# EAGLE board f (EAGLE 7.1.0)
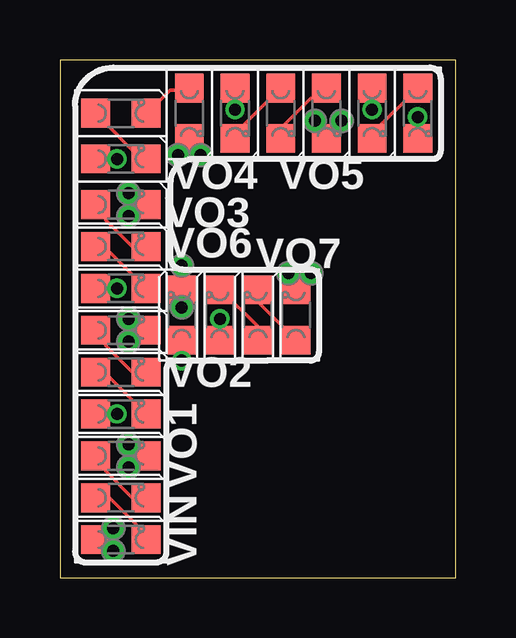
[diagram p0: board, top side]
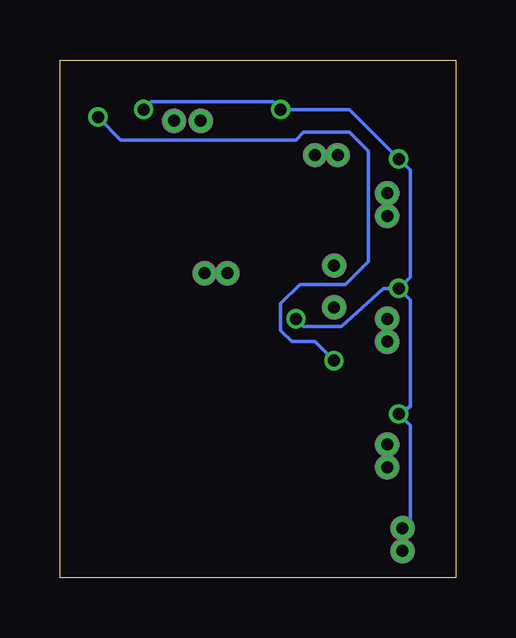
[diagram p1: board, bottom side, seen from below]

Size 16.51 x 21.59 mm. Coordinates in mm from the lower left corner, seen from the top.
Outline: 0,0 16.51,0 16.51,21.59 0,21.59 0,0
Copper layers (1*16): Top 0.035mm / dielectric 1.5mm / Bottom 0.035mm
Design rules "Fusion_eagle_rule_v1.1_tms *": minimum track width 6mil, minimum drill 12mil, track to track 6mil, track to pad 6mil, pad to pad 6mil, via to via 6mil, smd to smd 0mil, copper to edge 10mil, drill to drill 10mil, minimum pad ring 10mil, minimum via ring 6mil, stop-mask expansion 2mil, vias tented up to drill 100mil, thermal gap 10mil

## Footprints (pad centres in the part's own frame; a part is rotated, then mirrored left to right if it is on the bottom)
LED_0805 = smd 1.2 x 1.2: A 0,-1.05; C 0,1.05
P1-20 = drill 0.5: TP 0,0

## Placement (x,y rotation side)
LED1  [LED_0805]  2.54,1.59 270 top
LED2  [LED_0805]  2.54,3.33 270 top
LED3  [LED_0805]  2.54,5.08 270 top
LED4  [LED_0805]  2.54,6.83 270 top
LED5  [LED_0805]  2.54,8.57 270 top
LED6  [LED_0805]  2.54,10.32 270 top
LED7  [LED_0805]  2.54,12.06 270 top
LED8  [LED_0805]  2.54,13.81 270 top
LED9  [LED_0805]  2.54,15.56 270 top
LED10  [LED_0805]  2.54,17.46 270 top
LED11  [LED_0805]  2.54,19.37 270 top
LED12  [LED_0805]  5.4,19.37 180 top
LED13  [LED_0805]  7.3,19.37 180 top
LED14  [LED_0805]  9.21,19.37 180 top
LED15  [LED_0805]  11.11,19.37 180 top
LED16  [LED_0805]  13.02,19.37 180 top
LED17  [LED_0805]  14.92,19.37 180 top
LED18  [LED_0805]  5.08,10.95 0 top
LED19  [LED_0805]  6.67,10.95 0 top
LED20  [LED_0805]  8.26,10.95 0 top
LED21  [LED_0805]  9.84,10.95 0 top
VIN  [P1-20]  2.22,2.06 0 top
VIN1  [P1-20]  2.22,1.11 0 top
VO1  [P1-20]  2.86,4.6 0 top
VO2  [P1-20]  2.86,9.84 0 top
VO3  [P1-20]  2.86,16.03 0 top
VO4  [P1-20]  4.92,17.62 0 top
VO5  [P1-20]  10.64,19.05 0 top
VO6  [P1-20]  5.08,11.27 0 top
VO7  [P1-20]  10.48,12.7 0 top
VO8  [P1-20]  2.86,5.56 0 top
VO9  [P1-20]  2.86,10.79 0 top
VO10  [P1-20]  2.86,15.08 0 top
VO11  [P1-20]  5.87,17.62 0 top
VO12  [P1-20]  11.75,19.05 0 top
VO13  [P1-20]  5.08,13.02 0 top
VO14  [P1-20]  9.53,12.7 0 top

## Library data of the parts
LED1-LED21 VIN VIN1 VO1-VO14 = CyberRailGuru

## Nets
N$1: LED19.C LED20.A
N$2: LED20.C LED21.A
N$3: LED21.C VO7.TP VO14.TP
N$39: LED2.C LED3.A
N$40: LED1.C LED2.A
N$41: LED5.C LED6.A
N$42: LED4.C LED5.A
N$43: LED8.C LED9.A
N$44: LED7.C LED8.A
N$45: LED11.C LED12.A
N$46: LED10.C LED11.A
N$47: LED14.C LED15.A
N$48: LED13.C LED14.A
N$49: LED17.C LED18.A
N$50: LED16.C LED17.A
VIN: LED1.A LED4.A LED7.A LED10.A LED13.A LED16.A LED19.A VIN1.TP VIN.TP
VOUT1: LED3.C VO1.TP VO8.TP
VOUT2: LED6.C VO2.TP VO9.TP
VOUT3: LED9.C VO3.TP VO10.TP
VOUT4: LED12.C VO4.TP VO11.TP
VOUT5: LED15.C VO5.TP VO12.TP
VOUT6: LED18.C VO6.TP VO13.TP

## Tracks (layer width: path | path; a pad name or v marks a point on that pad's centre or on a via)
N$1
  Top 0.152: LED19.C 6.73,12 8.26,10.48 LED20.A
N$2
  Top 0.152: LED20.C 8.26,11.49 LED21.A
N$3
  Top 0.152: VO14.TP 9.53,12.32 LED21.C 10.22,12.38 10.48,12.38 VO7.TP
N$39
  Top 0.152: LED2.C 3.02,3.33 1.91,4.45 1.91,4.67 LED3.A
N$40
  Top 0.152: LED2.A 2.06,3.33 3.17,2.22 3.17,2 LED1.C
N$41
  Top 0.152: LED5.C 3.02,8.57 1.91,9.68 1.91,9.9 LED6.A
N$42
  Top 0.152: LED5.A 1.84,8.57 LED4.C
N$43
  Top 0.152: LED8.C 3.02,13.81 1.91,14.92 1.91,15.14 LED9.A
N$44
  Top 0.152: LED8.A 1.84,13.81 LED7.C
N$45
  Top 0.152: LED11.C 3.65,19.37 4.6,20.32 5.3,20.32 LED12.A
N$46
  Top 0.152: LED10.C 3.4,17.46 LED11.A
N$47
  Top 0.152: LED14.C 9.21,18.73 10.48,20 10.7,20 LED15.A
N$48
  Top 0.152: LED13.C 7.3,18.51 LED14.A
N$49  (via drill 0.5)
  Top 0.152: LED17.C v14.92,19.21 | v5.08,9.05 LED18.A
  Bottom 0.152: v14.92,19.21 13.97,18.26 6.67,18.26 6.35,18.57 4.45,18.57 3.65,17.78 3.65,13.18 4.6,12.22 6.51,12.22 7.3,11.43 7.3,10.32 6.83,9.84 5.87,9.84 v5.08,9.05
N$50
  Top 0.152: LED16.C 13.02,18.51 LED17.A
VIN  (via drill 0.5)
  Top 0.152: VIN.TP 1.97,2.06 LED1.A 1.97,1.11 VIN1.TP | LED16.A v13.02,19.53 | v7.3,19.53 LED13.A | LED10.A v2.38,17.46 | LED7.A v2.38,12.06 | LED4.A v2.38,6.83 | v6.67,10.79 LED19.A
  Bottom 0.152: v13.02,19.53 12.7,19.84 7.62,19.84 v7.3,19.53 4.45,19.53 v2.38,17.46 1.91,16.99 1.91,12.54 v2.38,12.06 | VIN.TP 1.91,2.38 1.91,6.35 v2.38,6.83 1.91,7.14 1.91,11.59 v2.38,12.06 | v2.38,12.06 3.02,12.06 4.76,10.48 6.35,10.48 v6.67,10.79
VOUT1
  Top 0.152: VO1.TP 3.11,4.6 LED3.C 3.11,5.56 VO8.TP
VOUT2
  Top 0.152: VO9.TP 3.11,10.79 LED6.C 3.11,9.84 VO2.TP
VOUT3
  Top 0.152: VO3.TP 3.11,16.03 LED9.C 3.11,15.08 VO10.TP
VOUT4
  Top 0.152: VO4.TP 4.92,17.84 LED12.C 5.87,17.84 VO11.TP
VOUT5
  Top 0.152: VO5.TP 10.64,18.79 LED15.C 11.75,18.95 VO12.TP
VOUT6
  Top 0.152: VO6.TP LED18.C VO13.TP

## Text on the board
201bmp: F